# Altium PCB TestCase1.PcbDoc
Units mil, origin at the board's own origin, x right, y up, seen from the top; angles counter-clockwise.
Board outline 2390 x 1990 mil, 2 copper layers (TopLayer, BottomLayer); 173 components, 102 nets, 472 pads, 113 vias.
Unrouted connection lines stored in the file: 6.
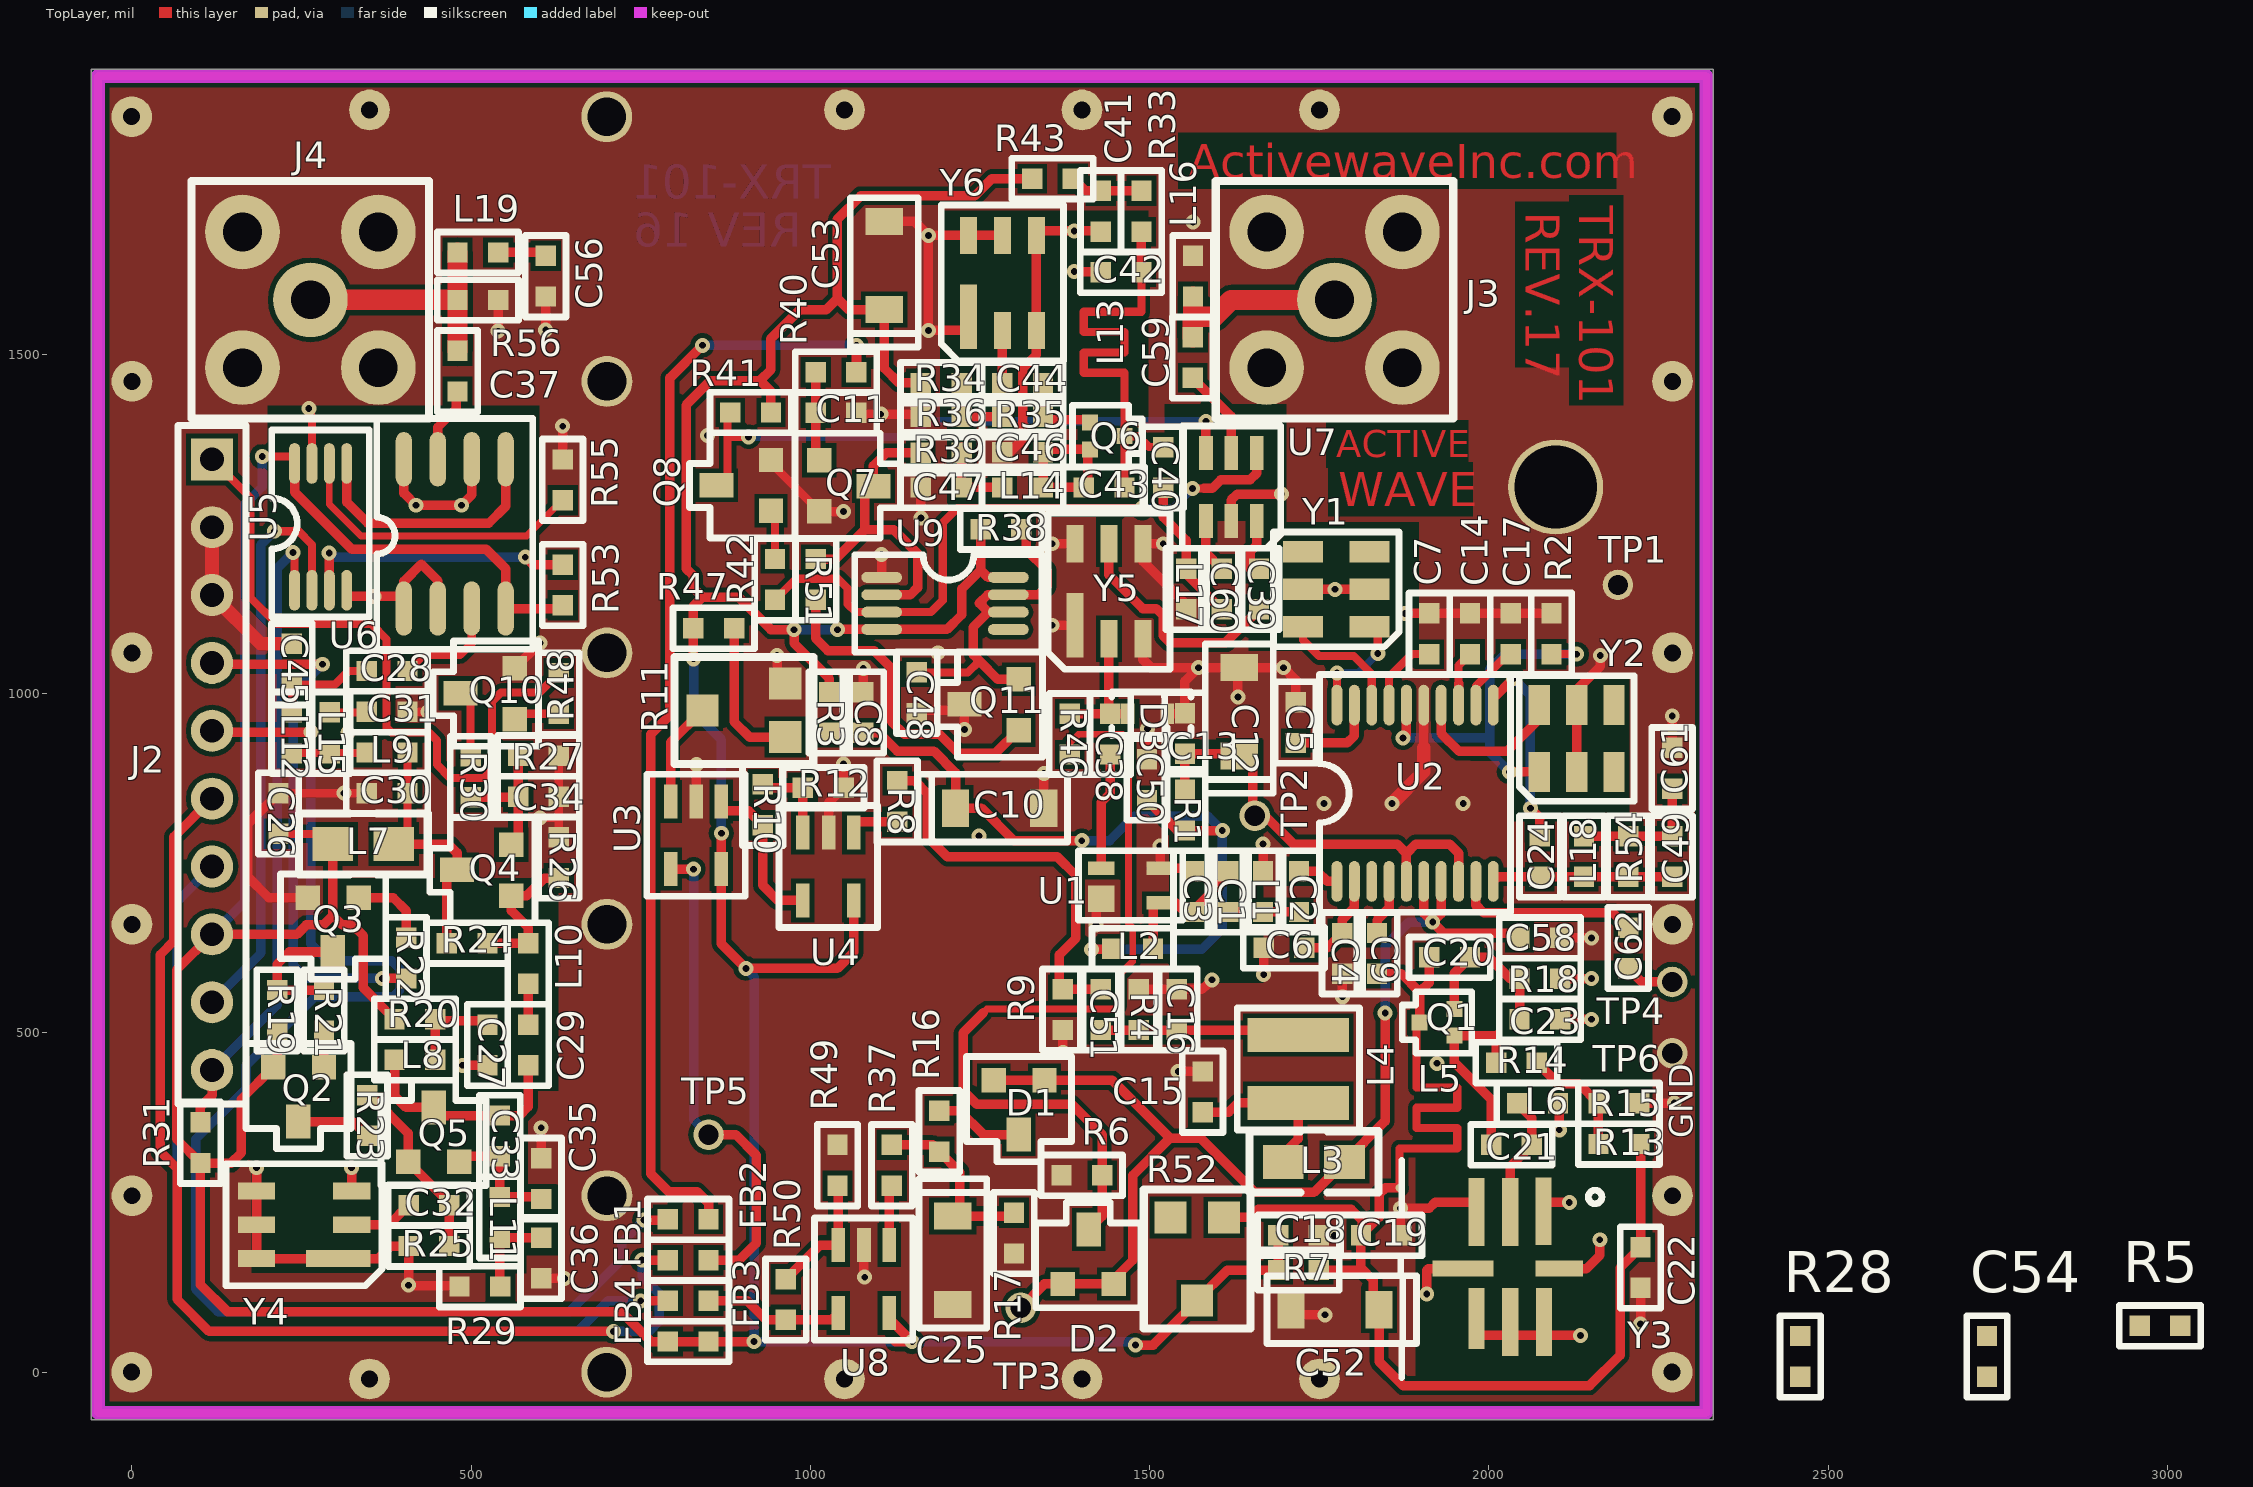
[diagram p0: TopLayer view]
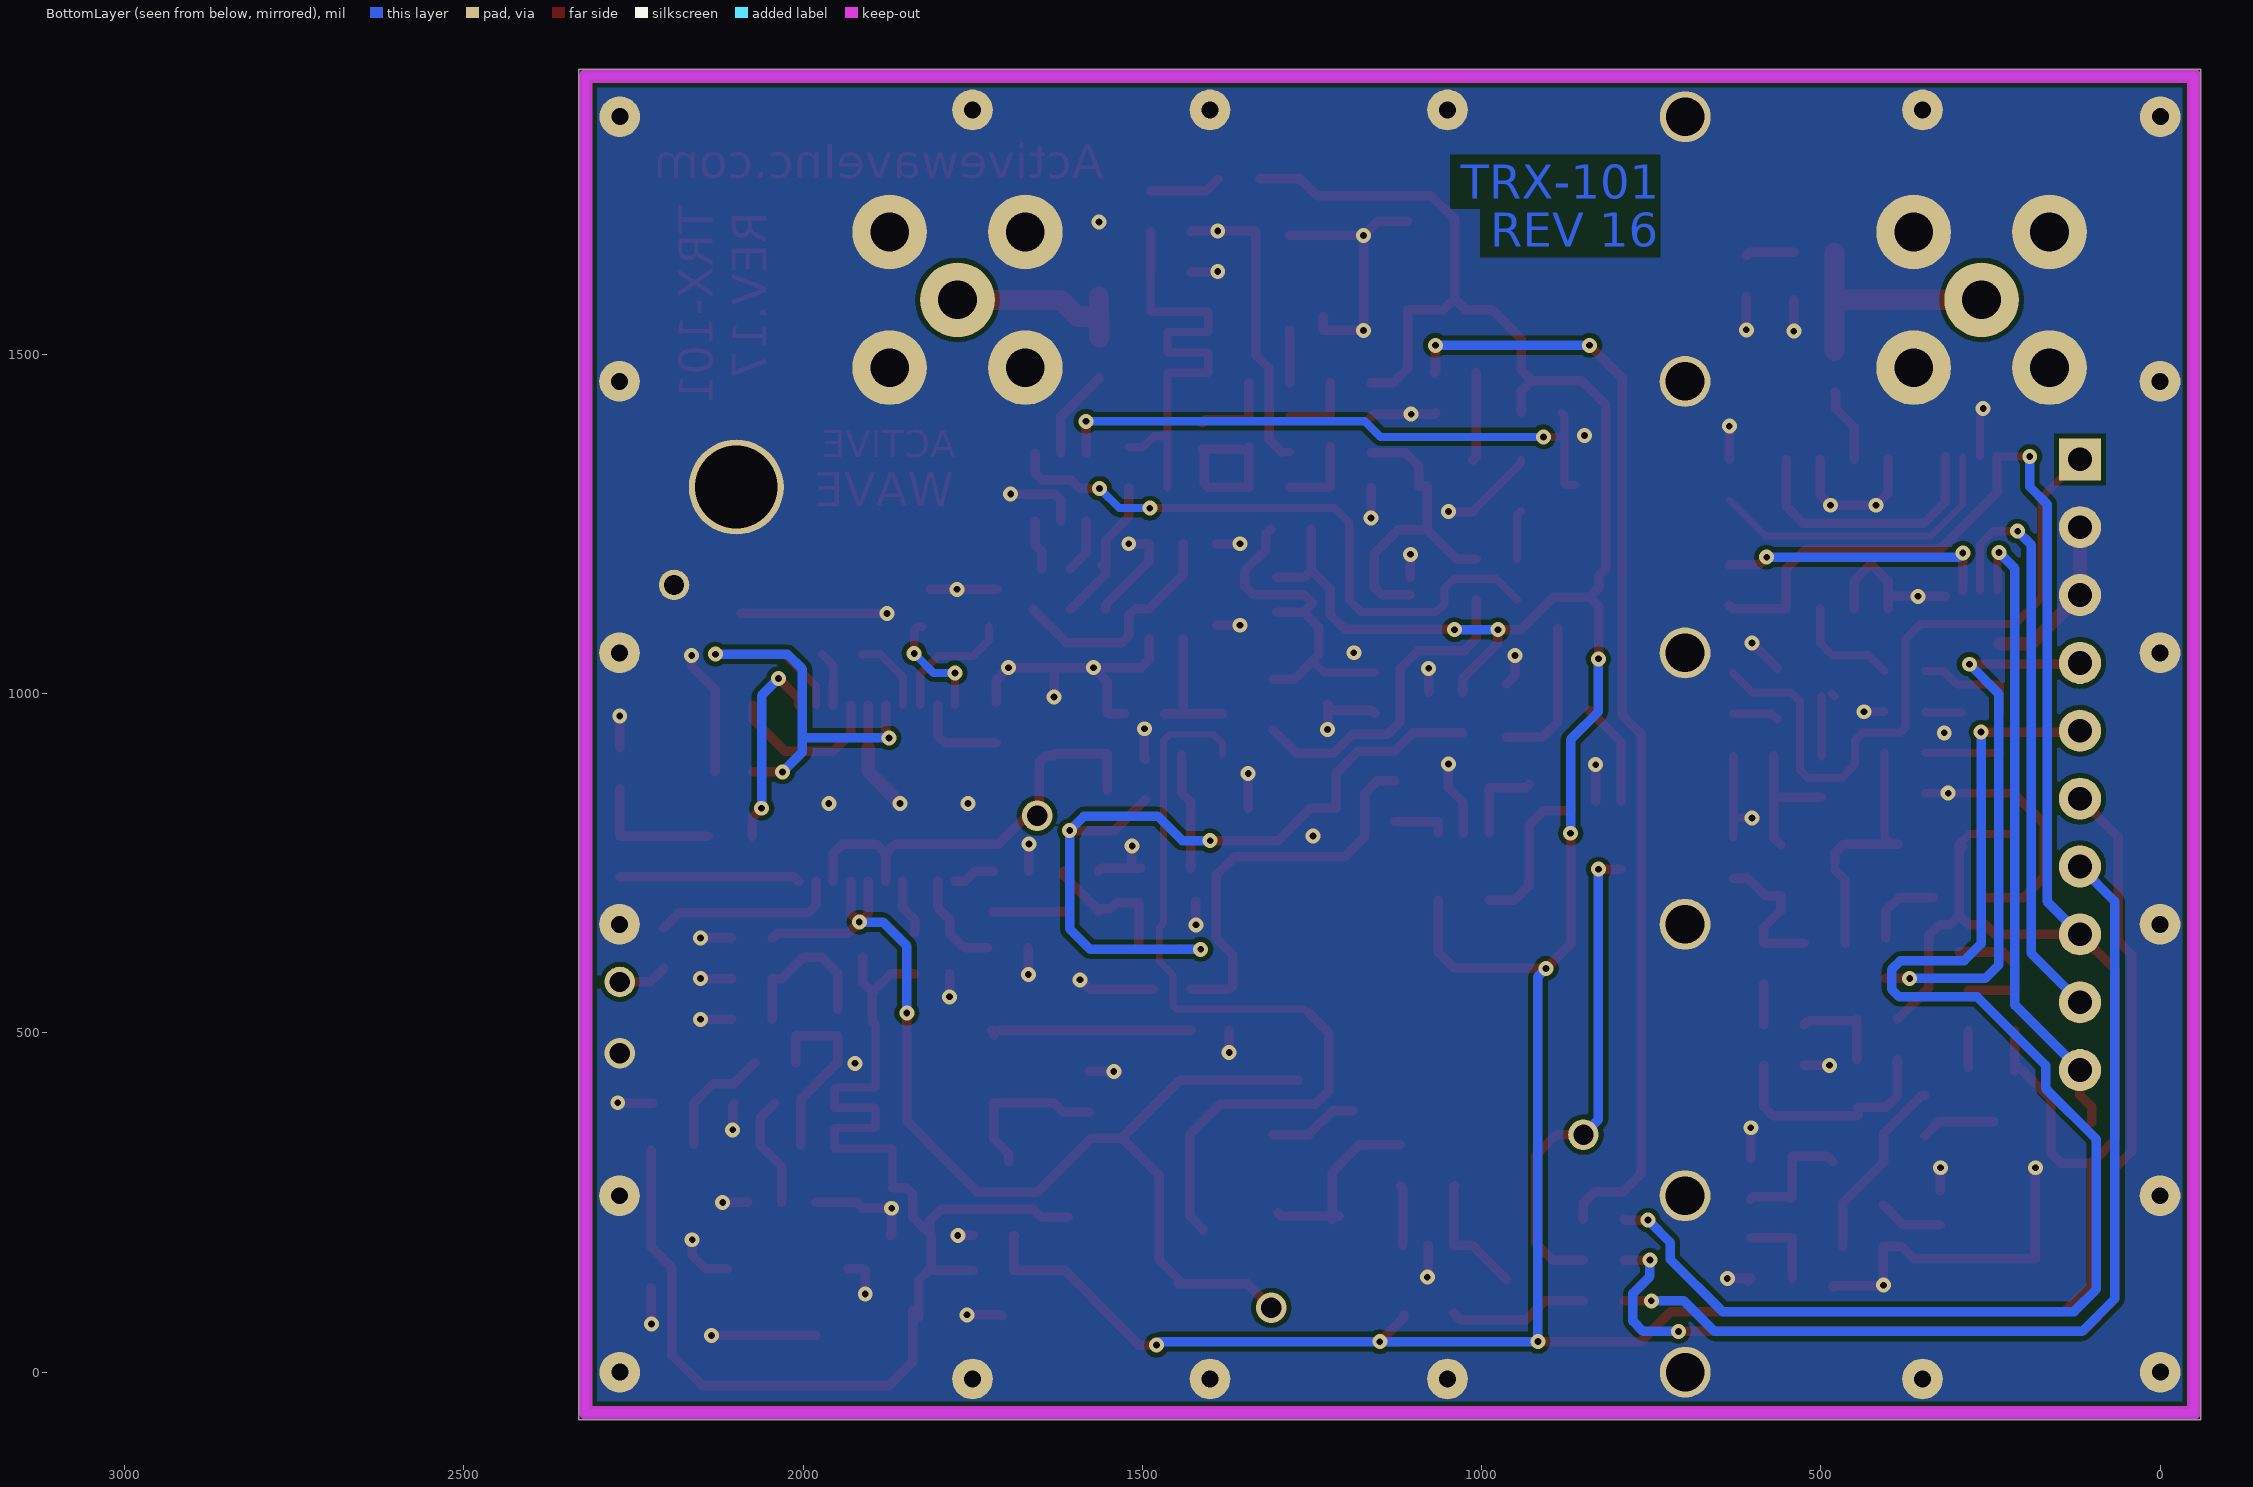
[diagram p1: BottomLayer view, seen from below]

## Layer stack, top to bottom
TopLayer: signal copper 1.4
Dielectric: core 12.6, FR-4, Dk 4.8
BottomLayer: signal copper 1.4

## Board outline
-59.68,-70 2330.32,-70 2330.32,1920 -59.68,1920

## Design rules (kind name [scope] priority, off if disabled: settings)
Clearance Clearance_1 [InNet('GND_SIGNAL')] p1 off: gap=10
Clearance [All] p2: gap=7
ComponentClearance [All] p1 off: gap=10 collisioncheckmode=0 verticalgap=10
PolygonConnect [All] p1: connectstyle=Direct reliefconductorwidth=10 reliefentries=4 polygonreliefangle="90 Angle"
RoutingVias RoutingVias_1 [All] p1: holewidth=10 width=22 viastyle="Through Hole" minholewidth=10 minwidth=22 maxholewidth=10 maxwidth=22
SolderMaskExpansion [All] p1: expansion=4
TestPointUsage [All] p1: valid=0 allowmultiple=FALSE
Testpoint [All] p1: side=15 testpointundercomponent=TRUE minsize=40 maxsize=100 preferedsize=60 minholesize=20 maxholesize=40 preferedholesize=32 testpointgrid=1 style=1023 order=0123456789
Width [All] p1: maxlimit=100 minlimit=8 preferedwidth=10
18 further rules are at their usual default settings.

## Components (designator, comment, footprint, x,y, rotation, side; value= is the part's Value field where it differs from the comment)
C1 "27 pF" 0603 1616,738.18 r270 top
C2 ".1uF" 0603 1720,678.18 r90 top
C3 "5 pF" 0603 1565,678.18 r90 top
C4 ".1uF" 0603 1784,587.18 r90 top
C5 ".1uF" 0603 1715,927.18 r90 top
C6 "100pF" 0603 1668,625.18 r0 top
C7 ".1uF" 0603 1912.06,1058.18 r90 top
C8 ".1uF" 0603 1078,942.18 r90 top
C9 "5pF" 0603 1835,587.18 r90 top
C10 "10uF" "CAP A CASE" 1214,831.18 r0 top
C11 "33 pF" 0603 1007.87,1413.72 r0 top
C12 "10uF" "CAP A CASE" 1632,908.18 r90 top
C13 ".1uF" 0603 1552,911.18 r90 top
C14 ".1uF" 0603 1972.06,1058.18 r90 top
C15 "0.22" 0603 1578,443.18 r270 top
C16 "0.001uF" 0603 1540,564.18 r270 top
C17 ".1uF" 0603 2032.06,1058.18 r90 top
C18 ".1uF" 0603 1689.36,201.54 r0 top
C19 "33 pF" 0603 1811.36,201.54 r0 top
C20 ".5 pF" 0603 1912,611.18 r0 top
C21 "100 pF" 0603 2003.23,334.93 r0 top
C22 ".1uF" 0603 2223.32,184.18 r270 top
C23 "4pF" 0603 2045,520 r0 top
C24 "1pF" 0603 2075,730 r90 top
C25 "10uF" "CAP A CASE" 1210,230 r270 top
C26 ".1uF" 0603 216.32,793.18 r90 top
C27 "100 pF" 0603 524.32,452.18 r90 top
C28 "4 pF" 0603 406.32,1033.18 r180 top
C29 "47 pF" 0603 584.32,512.18 r270 top
C30 "10 pF" 0603 406.32,853.18 r180 top
C31 "5 PF" 0603 346.32,973.18 r0 top
C32 "100 pF" 0603 408,246.18 r0 top
C33 "2 pF" 0603 542.32,318.18 r90 top
C34 "100 pF" 0603 569.32,848.18 r0 top
C35 "7 PF" 0603 603.32,315.18 r270 top
C36 "100 pF" 0603 603.32,198.18 r270 top
C37 "47 pF" 0603 480,1505 r270 top
C38 "100 pF" 0603 1442,970.18 r270 top
C39 "100 pF" 0603 1661,1184 r270 top
C40 "47 pF" 0603 1520,1303.18 r90 top
C41 ".001uF" 0603 1427.87,1740.72 r270 top
C42 "33 pF" 0603 1487.94,1620.65 r180 top
C43 "3 pF" 0603 1462.87,1303.72 r180 top
C44 "100 pF" 0603 1342.87,1457.72 r180 top
C45 "3 pF" 0603 236,1013.25 r90 top
C46 "6 pF" 0603 1342.87,1355.72 r180 top
C47 "100 pF" 0603 1162.87,1303.72 r0 top
C48 ".1uF" 0603 1157,1031.18 r270 top
C49 "39pF" 0603 2270,730 r90 top
C50 ".1uF" 0603 1496,843.18 r90 top
C51 ".1uF" 0603 1428,564.18 r270 top
C52 "10uF" "CAP A CASE" 1838,92.18 r180 top
C53 "10uF" "CAP A CASE" 1108.87,1565.72 r90 top
C54 ".1uF" 0603 2733.86,-6.72 r90 top
C56 "3 pF" 0603 610,1645 r270 top
C58 "1000pF" 0603 2105,640 r180 top
C59 "100 pF" 0603 1563.32,1525.18 r270 top
C60 "6.5 pF" 0603 1606,1184 r270 top
C61 ".1uF" 0603 2270,860 r90 top
C62 ".1uF" 0603 2205,595 r90 top
D1 "1N914" "SOT23 DIODE" 1345,430 r180 top
D2 "1N914" "SOT23 DIODE" 1372,130 r0 top
D3 "BAR 65" "DIODE SC79" 1497.01,970.18 r180 top
FB1 "FB" 0603 850,165.18 r180 top
FB2 "FB" 0603 850,225.18 r180 top
FB3 "FB" 0603 850,105.18 r180 top
FB4 "FB" 0603 790,45.18 r0 top
J2 "CON10" "1X10 HEADER" 118.32,1345.18 r270 top
J3 "SMA ANT" "50 OHM ANT" 1772.32,1580.18 r0 top locked
J4 "SMA ANT" "50 OHM ANT" 263.32,1580.18 r0 top locked
L1 "4.7nH" 0603 1667,678.18 r90 top
L2 "8.2nH" 0603 1505,624.18 r180 top
L3 "6.8 uH" 0805 1697,310 r0 top
L4 "2.2 mH" "COIL TKS5540CT-ND" 1718.98,446.71 r0 top
L5 "Microstrip" MICROSTRIP 1868.24,271.67 r90 top
L6 "???" 0603 2041.62,396.18 r0 top
L7 "330 nH" 0805 296.32,778.18 r0 top
L8 "100 nH" 0603 447.32,460.18 r180 top
L9 "6.8 nH" 0603 406.32,913.18 r180 top
L10 "47 nH" 0603 584.32,572.18 r90 top
L11 "100 nH" 0603 542.32,258.18 r270 top
L12 "22nH" 0603 236,912.25 r90 top
L13 "Microstrip" MICROSTRIP 1487.94,1620.65 r270 top
L14 "0.18uH" 0603 1282.87,1303.72 r0 top
L15 "6.8 nH" 0603 292,912.25 r90 top
L16 "3.9nH" 0603 1563.86,1585 r90 top
L17 "4.7nH" 0603 1554,1124 r90 top
L18 "5.6uH" 0603 2140,730 r90 top
L19 "6.8 nH" 0603 540,1650 r180 top
Q1 "NE85619" "3 PIN ULTRA SUPER MINI MOLD" 1949,535.18 r180 top
Q2 "2N3906" "SOT23 TRANS" 283.32,449.18 r180 top
Q3 "2N3904" "SOT23 TRANS" 334.32,699.18 r180 top
Q4 "BFR193" "SOT23 TRANS" 559.32,702.18 r90 top
Q5 "BFR193" "SOT23 TRANS" 407.32,310.18 r0 top
Q6 "NE85619" "3 PIN ULTRA SUPER MINI MOLD" 1411.87,1359.72 r0 top
Q7 "2N3904" "SOT23 TRANS" 1012.87,1343.72 r270 top
Q8 "2N3904" "SOT23 TRANS" 942,1269.18 r90 top
Q10 "2N3904" "SOT23 TRANS" 564.31,962.25 r90 top
Q11 "2N3906" "SOT23 TRANS" 1307,946.18 r90 top
R1 "56" 0603 1552,798.18 r90 top
R2 "330" 0603 2092.06,1058.18 r90 top
R3 "10" 0603 1028,942.18 r90 top
R4 "470" 0603 1484,564.18 r270 top
R5 "3.3K" 0603 2958.86,68.28 r0 top
R6 "10K" 0603 1430,290 r180 top
R7 "560" 0603 1749.36,150.54 r180 top
R8 "1K" 0603 1128,871.18 r270 top
R9 "150K" 0603 1372,564.18 r270 top
R10 "100K" 0603 930,866.18 r270 top
R11 "5K POT" "POT PANA EVN5" 900,975.18 r90 top
R12 "10K" 0603 989,861.18 r0 top
R13 "6.8K" 0603 2221.32,336.18 r180 top
R14 "4.7K" 0603 2010.62,456.18 r0 top
R15 "39K" 0603 2161.32,396.18 r0 top
R16 "10" 0603 1190,325 r90 top
R17 "220 K" 0603 1300,235 r270 top
R18 "1K" 0603 2105,580 r180 top
R19 "4.7K" 0603 214.32,503.18 r90 top
R20 "22" 0603 387.32,520.18 r0 top
R21 "2.2K" 0603 283.32,563.18 r270 top
R22 "4.7K" 0603 404.32,640.18 r270 top
R23 "6.8k" 0603 347,348.25 r90 top
R24 "470" 0603 464.32,632.18 r0 top
R25 "3.3K" 0603 468,185.86 r180 top
R26 "1K" 0603 629.32,728.18 r90 top
R27 "560" 0603 569.32,908.18 r0 top
R28 "5.6K" 0603 2458.86,-6.72 r90 top
R29 "180" 0603 543,126.18 r180 top
R30 "68" 0603 499.32,907.18 r270 top
R31 "100K" 0603 101.32,308.18 r90 top
R33 "22" 0603 1487.87,1680.72 r90 top
R34 "6.8K" 0603 1162.87,1457.72 r0 top
R35 "4.7K" 0603 1342.87,1407.72 r180 top
R36 "39K" 0603 1222.87,1407.72 r180 top
R37 "1K" 0603 1120,335 r270 top
R38 "10K" 0603 1311,1242.18 r180 top
R39 "68" 0603 1162.87,1354.72 r0 top
R40 "4.7K" 0603 1067.87,1473.72 r180 top
R41 "10K" 0603 882,1414.18 r0 top
R42 "4.7K" 0603 948,1198.18 r270 top
R43 "22" 0603 1326.87,1758.72 r0 top
R46 "2.2K" 0603 1382.01,910.18 r90 top
R47 "15K" 0603 887.68,1096.25 r180 top
R48 "1K" 0603 629.31,970.25 r90 top
R49 "10K" 0603 1040,275 r90 top
R50 "56K" 0603 964,137.18 r270 top
R51 "4.7K" 0603 1008,1198.18 r270 top
R52 "5K POT" "POT PANA EVN5" 1570,165 r180 top
R53 "10K" 0603 635,1190 r270 top
R54 "8.2K" 0603 2205,790 r270 top
R55 "1K" 0603 635,1345 r270 top
R56 "50" 0603 540,1580 r180 top
TP1 "TP" TESTPOINT 2190,1160 r90 top
TP2 "TP" TESTPOINT 1655,820 r90 top
TP3 "TP" TESTPOINT 1310,95 r90 top
TP4 "TP" TESTPOINT 2270,575 r90 top
TP5 "TP" TESTPOINT 850,350 r90 top
TP6 "GND" TESTPOINT 2270,470 r90 top
U1 "BGA2001" SOT343 1472,717.18 r270 top
U2 "SA636DK" SSOP20 1776,723.18 r0 top
U3 "TLV1391" SOT25 869,841.18 r270 top
U4 "LMV821" SOT25 1064,795.18 r270 top
U5 "DS1804" "SO8 SMALL" 240,1152.25 r0 top
U6 "AT-113" SO8 401,1125.25 r90 top
U7 "UPG52TA" TO6 1583,1254.18 r90 top
U8 "LMV821" SOT25 1116,187.18 r270 top
U9 "LMC555" "SO8 SMALL" 1105,1171.18 r270 top
Y1 "10.7 Mhz Filter" FILTER2 1824.1,1098.5 r90 top
Y2 "10.7 Mhz Filter" FILTER2 2074.05,884.5 r0 top
Y3 "905.8_Resonator" RESONATOR 2031.32,152.18 r0 top
Y4 "433.92_Resonator" RESONATOR2 254,217.25 r180 top
Y5 "916.5_MHz Saw Filter" RESONATOR2 1439.98,1150.71 r90 top
Y6 "916.5_Resonator" RESONATOR2 1282.94,1605.04 r90 top

## Footprints (in the part's own frame and the unit in brackets; to place one, negate y for a bottom-side part, rotate by r counter-clockwise, add the part's x,y. Pads: shape width x height; smd on the part's side, far side on the other; paste and mask are expansions set on the pad)
"1X10 HEADER" [mil]
  rect 62x62 hole 35: 1(0,0)
  round 62 hole 35: 2(100,0) 3(200,0) 4(300,0) 5(400,0) 6(500,0) 7(600,0) 8(700,0) 9(800,0) 10(900,0)
  silkscreen extent -50,-50 950,50
"3 PIN ULTRA SUPER MINI MOLD" [mm]
  rect 0.6x0.6 smd: B(0,1) C(1.3,0.5) E(0,0)
  silkscreen extent -0.65,-0.65 1.95,1.65
"50 OHM ANT" [mil]
  round 110 hole 57: 1(0,0) 2(-100,100) 3(100,100) 4(100,-100) 5(-100,-100)
  silkscreen extent -175,-175 175,175
0603 [mil]
  rect 30x30 smd: 1(0,0) 2(60,0)
  silkscreen extent -30,-30 90,30
0805 [mil]
  rect 60x50 smd: 1(0,0) 2(90,0)
  silkscreen extent -50,-45 140,45
"CAP A CASE" [mil]
  rect 40x55 smd: 1(0,0) 2(130,0)
  silkscreen extent -55,-50 165,50
"COIL TKS5540CT-ND" [mil]
  rect 150x50 smd: 1(0,-50) 2(0,50)
  silkscreen extent -90,-90 90,90
"DIODE SC79" [mil]
  rect 20x30 smd: A(29,0) K(-29,0)
  silkscreen extent -64,-32 53,32
FILTER2 [mm]
  rect 0.8x1.5 smd: 1(0,0) 2(1.4,2.5) 2(1.4,0) 3(2.8,0) 3(2.8,2.5) 4(0,2.5)
  silkscreen extent -0.75,-1.1 3.55,3.6
MICROSTRIP [mil]
  round 12 smd: 1(0,0) 2(241.41,-25)
  TopLayer lines w12: 0,0 57.94,0 57.94,-85 87.94,-85 87.94,-25 117.94,-25 117.94,-30 117.94,-85 147.94,-85 147.94,-25 241.19,-25 241.41,-25
"POT PANA EVN5" [mm]
  rect 1.2x1.2 smd: 1(-1,-1.6) 2(0,1.5) 3(1,-1.6)
  silkscreen extent -2,-2.65 2,2.55
RESONATOR [mm]
  rect 0.6x2.54 smd: 1(1.245,2.159) 2(0,2.134) 3(-1.27,2.134) 6(0,-1.983) 7(1.27,-1.983)
  rect 2.286x0.6 smd: 4(-1.776,0.008)
  rect 0.6x2.286 smd: 5(-1.27,-1.856)
  rect 1.778x0.6 smd: 8(1.831,0.008)
  silkscreen extent 2.92,2.44 3.43,2.95
RESONATOR2 [mil]
  rect 95x25 smd: 1(-50,50)
  rect 55x25 smd: 2(-70,0) 3(-70,-50) 4(70,-50) 5(70,0) 6(70,50)
  silkscreen extent -115,-90 115,90
SO8 [mil]
  oval 80x24 smd: 1(0,0) 2(0,-50) 3(0,-100) 4(0,-150) 5(220,-150) 6(220,-100) 7(220,-50) 8(220,0)
  silkscreen extent -60,-190 280,40
"SO8 SMALL" [mil]
  oval 16x60 smd: 1(0,0) 2(25.59,0) 3(51.18,0) 4(76.77,0) 5(76.77,186.85) 6(51.18,186.85) 7(25.59,186.85) 8(0,186.85)
  silkscreen extent -33,-39 110,236
"SOT23 DIODE" [mil]
  rect 36x36 smd: A(0,0) A(75,0)
  rect 36x50 smd: K(38,80)
  silkscreen extent -40,-35 115,120
"SOT23 TRANS" [mil]
  rect 36x36 smd: B(0,0) E(75,0)
  rect 36x50 smd: C(38,80)
  silkscreen extent -40,-35 115,120
SOT25 [mil]
  rect 50x20 smd: 1(0,0) 2(0,-37) 3(0,-75) 4(100,-75) 5(100,0)
  silkscreen extent -40,-110 140,35
SOT343 [mm]
  rect 1x1 smd: 1(0.5,-1.1)
  rect 0.5x1 smd: 2(-0.65,-1.1) 3(-0.65,1.1) 4(0.65,1.1)
  silkscreen extent -1.3,-1.95 1.3,1.95
SSOP20 [mil]
  oval 16x60 smd: 1(0,0) 2(25.59,0) 3(51.18,0) 4(76.77,0) 5(102.36,0) 6(127.95,0) 7(153.54,0) 8(179.13,0) 9(204.72,0) 10(230.31,0) 11(230.31,259.84) 12(204.72,259.84) 13(179.13,259.84) 14(153.54,259.84) 15(127.95,259.84) 16(102.36,259.84) 17(76.77,259.84) 18(51.18,259.84) 19(25.59,259.84) 20(0,259.84)
  silkscreen extent -26,-45 256,305
TESTPOINT [mil]
  round 45 hole 30: 1(0,0)
TO6 [mil]
  rect 50x20 smd: 1(0,-75) 2(0,-37) 3(0,0) 4(100,0) 5(100,-37) 6(100,-75)
  silkscreen extent -40,-110 140,35

## Part data
C24 C49 C61 C62: library part CAP, "Capacitor"
C54: library part CAP_NP
L18 L19: library part INDUCTOR
R5 R28 R55 R56: library part RESISTOR
R52: library part POT1, "Potentiometer"
R54: library part R
TP6: library part TP

## Free pads (board coordinates)
  round 60 hole 25: 0(0,0) 0(0,1850) 0(0.32,260) 0(0.32,660) 0(0.32,1060) 0(0.32,1460) 0(350.32,-10) 0(350.32,1860) 0(1050.32,-10) 0(1050.32,1860) 0(1400.32,-10) 0(1400.32,1860) 0(1750.32,-10) 0(1750.32,1860) 0(2270,0) 0(2270,1850) 0(2270.32,260) 0(2270.32,660) 0(2270.32,1060) 0(2270.32,1460)
  round 75 hole 57: 0(700,0) 0(700,1850) 0(700.32,260) 0(700.32,660) 0(700.32,1060) 0(700.32,1460)
  round 140 hole 122: 0(2098.32,1304.18)

## Via types
v1: diameter 22, hole 10, TopLayer to BottomLayer, tented both sides, 107 vias
v2: diameter 22, hole 10, TopLayer to BottomLayer, 6 vias

## Nets (pads, with @x,y where several pads share a name; then routed paths per layer and width w, separated by ;. In a path a pad name is that pad's centre, name@x,y a point inside that pad or via, vN(x,y) a via of type N, cw(c..) or ccw(c..) an arc to the next point about the centre after c; other vN are vias at no path point)
433_TX_DATA: J2.4 R22.2 | length 799.7
  TopLayer w14: J2.4 120.32,1043.18 v1(281.32,1043.18) ; v1(369.32,580.18) R22.2
  BottomLayer w14: v1(281.32,1043.18) 237.72,999.57 237.72,600.33 257.87,580.18 v1(369.32,580.18)
916_RX_DATA: FB1.1 TP5.1 U3.4 | length 727
  TopLayer w14: U3.4 v1(827.82,741.18) ; FB1.1@850,165 895,165 920,190 920,320 890,350 TP5.1
  BottomLayer w14: v1(827.82,741.18) 827.82,372.18 TP5.1
916_RX_FILTER_OUT: C38.2 U1.2 | length 172.9
  TopLayer w14: U1.2 1428.69,839.87 1442,853.18 C38.2
916_TX-DATA: FB2.1 R40.1 | length 1648.6
  TopLayer w14: v1(841,1513.18) 793,1465.18 793,968.18 765,940.18 765,292.18 791,266.18 833,266.18 850,249.18 FB2.1 ; v1(1068,1513.18) 1068,1473.84 R40.1 R40.1@1069.87,1471.72
  BottomLayer w14: v1(841,1513.18) v1(1068,1513.18)
+5V: C18.1 C26.1 C53.1 FB4.1 FB4.2 J2.8 L7.1 Q2.E R3.2 R5.1 R7.2 R19.1 R20.1 R31.1 R34.1 R38.2 R41.2 R43.1 R47.2 R52.2 R53.2 U3.5 U4.5 U5.8 U8.5 U9.4 U9.8 | length 7966.6
  TopLayer w12: v1(192.31,1349.33) 239.77,1349.33 U5.8@240,1349.1 ; C26.1 281.32,793.18 L7.1
  TopLayer w14: Q2.E 161.32,402.18 161.32,323.18 146.32,308.18 R31.1 ; Q2.E@214.32,444.18 214.32,449.18 R19.1 ; U5.8@240,1349.1 U5.8 240,1297 324,1213 522.18,1213 551,1184.18 551,1125.25 630.25,1125.25 R53.2 ; L7.1@291.32,773.18 L7.1 296.32,673.18 ; R20.1 341.32,566.18 341.32,643.18 325.32,659.18 310.32,659.18 296.32,673.18 ; v1(828,1051.18) 827.68,1051.5 R47.2 827.68,1128.86 841,1142.18 ; v1(869,794.18) U3.5 869,631 v2(905,595) 1040,595 1064,619 U4.5 ; v1(917,45.18) FB4.2 FB4.1 765,45.18 721,89.18 141,89.18 101.32,128.86 R31.1 ; R41.2 942,1445.18 926,1461.18 ; R3.2 1028,1022.18 976,1074.18 v1(976,1094.18) 942,1094.18 894,1142.18 841,1142.18 ; v1@1040.23,1094.41 U9.4 1201.23,1094.41 1223,1116.18 1223,1154.18 1251,1182.18 ; U8.5@1115,85 1115,80 v1(1150,45) 1125,45 ; R34.1 1130.46,1457.72 1108.87,1479.31 C53.1 1056.46,1565.72 1040,1582.18 ; R38.2 1251,1182.18 ; U9.8@1301.85,1171.18 U9.8 1262,1171.18 1251,1182.18 ; R43.1 1267.6,1758.72 1242.52,1733.64 1074.46,1733.64 1040,1699.18 1040,1582.18 ; v1@1481,40 1505,40 1570,105 R52.2 1614.6,150.54 R7.2 C18.1 C18.1@1687.82,200 ; R31.1 66.32,343.18 66.32,593.18 J2.8 243.32,645.18 257.32,659.18 282.32,659.18 296.32,673.18 ; 841,1142.18 827.68,1155.5 827.68,1173.5 817,1184.18 817,1425.18 853,1461.18 926,1461.18 ; 926,1461.18 942,1477.18 942,1523.18 984.54,1565.72 1023.54,1565.72 1040,1582.18
  BottomLayer w14: J2.8 166.85,693.71 166.85,1279.25 192.31,1304.71 v1(192.31,1349.33) ; v1(828,1051.18) 828,973.18 869,932.18 v1(869,794.18) ; v2(905,595) 917,583 v1(917,45.18) 917.18,45 v1(1150,45) 1474,45 v1(1479,40) ; v1(976,1094.18) v1(1040,1094.18)
AGC: D2.K R6.1 R46.1 | length 1226.5
  TopLayer w10: 1255,530 1260,535 1450,535 1455,540 1455,585 1475,605 1475,655 1469,661 1469,931 1460,940 1395,940 1382.01,927.01 R46.1
  TopLayer w14: 1255,530 1225,500 1225,415 1245,395 1385,395 1430,350 R6.1 1430,230 D2.K
GND_SIGNAL: C3.2 C4.1 C5.2 C6.1 C7.2 C8.2 C10.2 C11.2 C12.2 C13.2 C14.2 C15.1 C16.1 C17.2 C18.2 C19.2 C22.2 C23.2 C25.2 C26.2 C27.1 C30.2 C31.2 C34.2 C35.1 C36.2 C41.2 C42.2 C45.2 C46.2 C47.1 C48.2 C50.2 C52.2 C53.2 C54.2 C56.2 C58.1 C61.2 D3.K J2.2 J2.3 J3.2 J3.3 J3.4 J3.5 J4.2 J4.3 J4.4 J4.5 L1.2 L6.2 L16.2 L17.1 pad.0 Q3.E Q7.E Q8.E Q10.E Q11.C R2.2 R4.1 R6.2 R9.2 R11.3 R12.2 R15.2 R17.2 R18.1 R25.2 R26.2 R27.2 R28.2 R29.2 R36.2 R49.2 R55.1 R56.1 TP1.1 TP6.1 U1.1 U1.3 U2.15 U3.2 U4.2 U5.4 U5.7 U6.1 U6.2 U6.6 U6.8 U7.2 U8.2 U9.1 Y1.2 Y2.2 Y3.1 Y3.3 Y3.4 Y3.5 Y3.6 Y3.7 Y3.8 Y4.1 Y4.3 Y4.4 Y4.5 Y4.6 Y5.1 Y5.3 Y5.4 Y5.6 Y6.1 Y6.3 Y6.4 Y6.5 Y6.6 | length 6647.4
  TopLayer w12: C26.2 v1(312.52,853.18) C30.2 ; v1(261,1420) 265.59,1406.86 U5.7@265.59,1349.1 ; C31.2 v1(436.64,973.18) ; v1(601.76,816.71) 629.32,816.71 ; R26.2 629.32,816.71 ; R27.2 C34.2 629.32,816.71 ; Q8.E 942,1339.59 Q7.E ; C46.2 C46.2@1294.54,1355.72
  TopLayer w14: v1(184,301.25) Y4.4 Y4.5 Y4.6 Y4.1 363.07,167.25 381.68,185.86 R25.2 v1(408,128.18) 407,127.18 408,127.18 482,127.18 R29.2 ; C26.2 170.79,807.65 170.79,730.25 201.86,699.18 Q3.E ; U5.4@316.77,1143.25 v1(357,1143.25) 400.61,1143.25 U6.1@401,1143.64 ; Y4.3 v1(324,301.25) ; U6.1 U6.1@401,1143.64 ; U6.8 401,1295.32 v1(418.82,1277.5) v1(485.75,1277.5) 501,1292.75 U6.6 ; U6.2 451,1166.58 426.69,1190.88 401,1165.19 U6.1@401,1143.64 ; v1(487.32,452.18) C27.1 ; v1@539,1533 v1(540,1534) R56.1 ; Q10.E v1(601.76,1074.69) ; C35.1 v1(603.32,360.18) ; C36.2@607.32,134.18 C36.2 v1(638,138.18) ; v1(610,1536) C56.2 ; R55.1 v1(635,1394) ; U3.2 v1(832,895.18) ; v1(951,1056.18) 951,1026.54 R11.3 ; Q7.E Q7.E@1013.41,1268.18 ; Q7.E@1013.87,1267.72 Q7.E@1013.41,1268.18 ; U4.2 1027,839.18 R12.2 v1(1049,896.18) ; v1(1049,1268.18) Q7.E@1013.41,1268.18 ; C11.2 1069.87,1411.72 v1(1103.87,1411.72) 1158.87,1411.72 R36.2 ; C8.2 v1(1078,1037.18) ; v2@1079,141 U8.2 ; U9.1 v1(1105,1205.18) ; C53.2 1153.42,1695.72 v1(1174.09,1675.04) ; C48.2 1161,975.18 1218,975.18 Q11.C v1(1227,947.18) ; v1(1162.87,1258.72) C47.1 ; Y6.1 1233.15,1555.04 1233.15,1535.04 1232.94,1535.04 v1(1174.09,1535.04) v1(1174.09,1675.04) ; Y6.5 Y6.6 v1(1174.09,1675.04) ; C46.2@1294.54,1355.72 1313,1374.18 1313,1479.18 1332.94,1499.13 Y6.3 Y6.4 1332.94,1680.34 1334.32,1681.72 v1(1388.87,1681.72) 1426.87,1681.72 C41.2 ; C10.2 v1(1344,882.18) ; v1(1356,1100.71) Y5.1 ; v1(1356,1220.71) Y5.6 ; v1(1372,471.18) R9.2 ; v1(1388.87,1621.72) 1426.87,1621.72 C42.2 ; v1(1421,659.18) U1.1@1421,693.87 ; R4.1 C16.1 1577,564.18 v1(1592,578.18) ; Y5.3 1489.98,1050.02 1501.82,1038.18 v1(1572,1038.18) ; C50.2 1497,904.18 v1(1497,948.18) ; U1.3@1502.41,742.77 U1.3 ; v1(1515,775.18) 1515.31,774.87 U1.3 ; v1(1520,1220.71) Y5.4 1489.98,1195.02 1554,1131 L17.1 ; D3.K 1551,970.18 C13.2 1552,1018.18 v1(1572,1038.18) ; v1(1542,443.18) C15.1 ; C3.2 1560.41,742.77 U1.3 ; U7.2 1620,1285 1629,1294 v1(1694,1294) ; v1(1630,995) C12.2@1630,1035 ; L1.2 v1(1667,778.18) ; v1(1668,586.18) C6.1 ; C52.2@1707.36,83.54 1708.36,84.54 v1(1758.36,84.54) ; Y1.2@1714.1,1153.61 1725.68,1153.61 v1(1773.16,1153.61) Y1.2@1812.53,1153.61 ; C5.2 1715,1020.18 v1(1697,1038.18) C12.2 v1(1572,1038.18) ; C18.2 v1(1771.86,201.54) ; v1(1784,553.18) C4.1 ; C19.2 1869.36,203.54 v1(1869.36,241.54) 1911.99,241.54 1920.63,250.18 Y3.3@1981.32,250.18 ; v1(1876.06,1118.18) C7.2 C14.2 C17.2 R2.2 ; 1903.95,920.13 U2.15 ; v1(1908.32,115.18) 1908.32,150.18 1910.65,152.5 Y3.4@1934.39,152.5 ; Y3.5@1981.32,54.12 2031.32,54.12 2081.32,54.12 v1@2134.88,54.12 ; Y3.1@2081.32,250.18 v1(2118.32,250.18) ; L6.2 2103.62,394.18 v1(2103.62,357.18) ; C23.2 v1(2151,520) ; R18.1 v1(2151,580) ; C58.1 v1(2151,640) ; Y3.8@2111.56,152.5 2143.5,152.5 2163.32,172.32 v1(2163.32,195.18) ; Y2.2@2129.17,884.5 2129.17,982.93 2129.17,1005.17 2164,1040 v1(2164,1056) ; R15.2 2272.18,396.18 v1(2273,397) ; v1(2223.32,70.86) C22.2 ; C61.2 v1(2270,967)
  TopLayer w20: J2.2 J2.3 190.25,1073.25 C45.2 ; v1(1857,838.18) 1903.95,885.13 1903.95,920.13
  other v1: 2135,54 1923.32,455.18 1248.32,790.18 1757,838.18 1962,838.18 318.32,942.18 1188.32,1060.18 848.32,1380.18 1563.86,1695
  other v2: 1080,140
NetC1_2: C1.2 C2.1 L1.1 | length 104
  TopLayer w14: C1.2 L1.1 C2.1
NetC2_2: C2.2 U2.1 | length 62.2
  TopLayer w14: C2.2 1747,738.18 1762,723.18 U2.1
NetC4_2: C4.2 C6.2 U2.2 | length 148.4
  TopLayer w14: C6.2 1762,625.18 C4.2 1784,667.18 1801.59,684.77 U2.2
NetC9_2: C9.2 U2.4 | length 83.4
  TopLayer w14: C9.2 1835,666.18 1852.77,683.95 U2.4
NetC10_1: C8.1 C10.1 C50.1 L2.2 R1.1 R3.1 | length 1210.4
  TopLayer w14: R3.1 C8.1 1101,942.18 1128,915.18 1182,915.18 1214,883.18 C10.1 1252,831.18 1300,783.18 v1(1400,783.18) ; v1(1414,623.18) 1444,623.18 L2.2 ; C50.1 1541,798.18 R1.1 v1(1607,798.18)
  BottomLayer w14: v1(1400,783.18) 1441,783.18 1477,819.18 1586,819.18 v1(1607,798.18) 1607,653.18 1577,623.18 v1(1414,623.18)
NetC15_2: C15.2 L3.1 L4.1 | length 242.4
  TopLayer w14: C15.2 1616.46,383.18 1629.99,396.71 L4.1 1718.98,343.97 1697,321.98 L3.1
NetC21_1: C21.1 Q1.B R14.1 | length 284.6
  TopLayer w14: C21.1 2003.23,402.12 1949,456.35 Q1.B 2010.25,495.81 ; R14.1 2010.62,496.18
NetC21_2: C21.2 L6.1 Y3.2 | length 168.2
  TopLayer w14: Y3.2@2031.32,250.18 2031.32,303.02 C21.2 2063.23,374.57 L6.1
NetC24_1: C24.1 C49.1 L18.1 R54.2 U2.10 | length 266.5
  TopLayer w14: U2.10 2013.13,730 C24.1 L18.1 R54.2 C49.1
NetC24_2: C24.2 U2.11 | length 299.4
  TopLayer w14: U2.11 2006.31,992.32 v2(2036,1022) ; v2(2061,831) 2075,817 C24.2
  BottomLayer w14: v2(2036,1022) 2061,997 v2(2061,831)
NetC27_2: C27.2 L8.1 R20.2 | length 140.3
  TopLayer w14: L8.1 R20.2 449.32,518.18 518.32,518.18 C27.2
NetC29_1: C29.1 L10.1 | length 60
  TopLayer w14: C29.1 L10.1
NetC31_1: C31.1 L15.2 | length 54.7
  TopLayer w12: L15.2 345.39,972.25 C31.1
NetC32_2: C32.2 Q5.B R23.2 R25.1 | length 275
  TopLayer w14: R23.2 351.25,408.25 407.32,352.18 Q5.B 468,249.5 C32.2 R25.1
NetC36_1: C36.1 L11.2 R29.1 | length 121
  TopLayer w14: R29.1@542.32,138.18 L11.2 C36.1
NetC37_1: C37.1 J4.1 L19.2 R56.2 | length 361.8
  TopLayer w30: J4.1 479.82,1580.18 R56.2 ; C37.1 R56.2 ; L19.2 R56.2
NetC39_2: C39.2 Y5.5 | length 346
  TopLayer w14: Y5.5 1439.98,1175.02 1490,1125 1510,1125 1520,1115 1520,1085 1530,1075 1612,1075 C39.2
NetC40_2: C40.2 C43.1 L13.2 Q6.C | length 139.1
  TopLayer w12: C43.1 1462.87,1379.06 1463,1379.18 1463.06,1379.18 1483,1379.18 1499,1363.18 C40.2
NetC44_2: C44.2 Y6.2 | length 77.4
  TopLayer w14: C44.2 1282.94,1457.79 Y6.2
NetC47_2: C47.2 L14.1 R39.2 | length 120
  TopLayer w14: R39.2@1222.87,1363.72 R39.2 C47.2 L14.1
NetC49_2: C49.2 C61.1 L18.2 R54.1 | length 200
  TopLayer w14: L18.2 R54.1 C49.2 C61.1
NetC52_1: C19.1 C22.1 C52.1 L5.1 R7.1 R13.1 R52.1 | length 1330.7
  TopLayer w14: R52.1 1647.99,227.99 1660,240 1796.72,240 1813.18,223.54 C19.1@1813.18,203.36 ; R7.1 1808.36,150.54 1811.36,153.54 ; C52.1@1837.36,73.82 1837.36,83.54 1831.36,83.54 1829.36,81.54 1829.36,92.18 1829.36,135.54 1811.36,153.54 ; C52.1 1838,15.5 1873.32,-19.82 2148.32,-19.82 2193.32,25.18 2193.32,154.18 C22.1 R13.1@2223.32,327.19 ; L5.1 1847.24,271.67 1838.3,262.73 1838.3,228.48 C19.1@1813.18,203.36 ; 1811.36,153.54 C19.1 C19.1@1813.18,203.36
NetC54_1: C54.1 R5.2 R28.1 U6.4
NetC56_1: C56.1 L19.1 | length 72.1
  TopLayer w14: L19.1 605,1650 C56.1
NetC57_2: C20.2 C23.1 Q1.E R18.2 | length 231.4
  TopLayer w14: Q1.E 1949,588.18 C20.2 1999.82,611.18 2031,580 R18.2 C23.1
NetC59_2: C59.2 U7.5 | length 134.5
  TopLayer w14: C59.2 1620,1408.5 U7.5
NetC60_2: C40.1 C60.2 L17.2 | length 221.9
  TopLayer w14: C40.1 1520,1260 1554,1226 L17.2 ; L17.2@1559,1189 L17.2 ; C60.2 1554,1176 L17.2
NetC62_1: C62.1 TP4.1 | length 73.3
  TopLayer w14: C62.1 2225,575 TP4.1
NetC62_2: C62.2 U2.9 | length 273
  TopLayer w14: U2.9 1980.72,688.28 1992,677 2183,677 C62.2
NetD1_K: D1.K R16.2 | length 131.5
  TopLayer w14: R16.2 1220,385 1255,350 D1.K
NetFB1_2: FB1.2 J2.6 | length 1654
  TopLayer w14: J2.6 62,788.86 62,635.18 42,615.18 42,325.18 67,300.18 67,107.18 114,60.18 v1(710,60.18) ; v1(752,165.18) FB1.2
  BottomLayer w14: v1(710,60.18) 762,60.18 777,75.18 777,116.18 752,141.18 v1(752,165.18)
NetFB2_2: FB2.2 J2.5 | length 2050.4
  TopLayer w14: J2.5 120.25,943.25 v1(264,943.25) ; v1(755,224.18) 789,224.18 FB2.2
  BottomLayer w14: v1(264,943.25) 264,631.25 289,606.25 383,606.25 396,593.25 396,564.25 385,553.25 270,553.25 169,452.25 169,418.25 94,343.25 94,122.25 127.07,89.18 645,89.18 722,166.18 722,191.18 v1(755,224.18)
NetFB3_2: FB3.2 J2.7 | length 1419.8
  TopLayer w14: v1(750,105.18) FB3.2
  BottomLayer w14: J2.7 67,693.86 67,108.18 115,60.18 657,60.18 702,105.18 v1(750,105.18)
NetJ3_1: C59.1 J3.1 L16.1 | length 277.5
  TopLayer w30: C59.1 L16.1 ; 1565,1555 1595,1555 1620,1580 J3.1
NetL3_2: C58.2 D1.A D2.A L3.2 TP3.1 U2.6 U2.7 | length 1700.6
  TopLayer w14: D1.A@1270,430 1345,430 1445,430 1530,345 ; TP3.1 1345,130 1372,130 1447,130 1447,137 1475,165 1475,290 1530,345 ; v1(1847,529.18) 1847,370 L3.2 1742,265 1655,265 1575,345 1530,345 ; U2.6 1903.95,676.23 v1(1917,663.18) ; U2.7 1929.54,675.72 v1(1917,663.18) ; C58.2 2038,647 1933.18,647 v1(1917,663.18)
  BottomLayer w14: v1(1847,529.18) 1847,628.18 1882,663.18 v1(1917,663.18)
NetL4_2: C16.2 C51.2 L4.2 R4.2 | length 297.1
  TopLayer w14: C51.2 R4.2 C16.2 1711.51,504.18 L4.2 ; L4.2@1718.98,504.18 L4.2@1722,504.18
NetL5_2: C9.1 C20.1 L5.2 Q1.C | length 175.6
  TopLayer w14: C9.1 1870.64,587.18 1897.82,560 ; Q1.C 1897.82,560 ; C20.1 1912,574.18 1897.82,560
NetL9_2: L9.2 L12.1 L15.1 | length 110.7
  TopLayer w12: L12.1 L15.1 345.39,912.25 L9.2
NetL10_2: L10.2 Q4.B R24.2 R26.1 | length 221.1
  TopLayer w14: R24.2 L10.2 584.32,655.18 559.32,680.18 Q4.B 582.12,702.18 608.12,728.18 R26.1
NetL11_1: C33.1 C35.2 L11.1 Q5.E | length 188.4
  TopLayer w14: Q5.E 490.32,318.18 C33.1 L11.1 ; L11.1@544.32,256.18 L11.1 ; C35.2 600.32,258.18 L11.1
NetL12_2: C28.2 C45.1 L12.2 | length 159.6
  TopLayer w12: L12.2 C45.1 299.76,1013.25 319.69,1033.18 C28.2
NetL14_2: C43.2 C46.1 L14.2 Q6.E | length 250.4
  TopLayer w14: L14.2 C43.2 1408.87,1309.72 1408.87,1356.72 Q6.E 1346.87,1359.72 1342.87,1363.72 C46.1 L14.2
NetQ5_C: C29.2 C33.2 L8.2 Q5.C | length 334.8
  TopLayer w14: L8.2 387.32,407.18 404.32,390.18 Q5.C 445.32,379.18 446.32,378.18 C33.2 571.32,378.18 584.32,391.18 C29.2
NetQ10_B: Q10.B R48.1 | length 68.3
  TopLayer w12: Q10.B 572.31,970.25 R48.1
NetQ11_B: Q11.B R51.2 | length 486.4
  TopLayer w14: R51.2 1008,1081.18 1026,1063.18 1094,1063.18 1120,1037.18 1120,958.18 1138,940.18 1190,940.18 1218,912.18 1273,912.18 Q11.B
NetR1_2: C12.1 C13.1 R1.2 TP2.1 U2.5 U2.8 | length 655.2
  TopLayer w14: R1.2 C13.1 1629,911.18 C12.1 1642,908.18 1652,898.18 1652,823 TP2.1 1670.18,820 1712,778.18 1864.72,778.18 1878.36,764.54 ; U2.5 1878.36,764.54 ; U2.8 1955.13,765.05 1942,778.18 1892,778.18 1878.36,764.54
NetR8_2: R8.2 U4.1 | length 79.4
  TopLayer w14: U4.1 1064,810.18 1065,811.18 R8.2
NetR9_1: C51.1 R8.1 R9.1 | length 594.1
  TopLayer w14: R8.1 1154,871.18 1172,853.18 1172,789.18 1202,759.18 1364,759.18 1391,732.18 1391,639.18 1367,615.18 1367,569.18 R9.1 C51.1
NetR10_2: R10.2 U3.1 U4.4 | length 240.8
  TopLayer w14: U3.1 869,827.18 909,827.18 R10.2 930,717.18 952,695.18 U4.4
NetR11_1: R11.1 R47.1 | length 222.5
  TopLayer w14: R47.1 887.68,958.5 910.37,935.81 R11.1
NetR11_2: R11.2 U3.3 | length 153.4
  TopLayer w14: U3.3 794,928.24 R11.2
NetR12_1: R10.1 R12.1 U4.3 | length 127.1
  TopLayer w14: R10.1 935,861.18 R12.1 U4.3
NetR15_1: R13.2 R14.2 R15.1 | length 175.6
  TopLayer w14: R14.2 2101.62,425.18 2132.32,425.18 R15.1 R13.2
NetR16_1: C25.1 R16.1 R17.1 R37.1 | length 278.6
  TopLayer w14: R37.1 1180,335 R16.1 1220,295 C25.1@1220,230 ; C25.1 C25.1@1220,230 ; C25.1@1220,225 C25.1@1220,230 ; R17.1 1295,230 C25.1@1220,230
NetR19_2: Q3.C R19.2 R21.1 | length 195.5
  TopLayer w14: R19.2 214.32,601.18 232.32,619.18 Q3.C ; R19.2@215.32,563.18 R21.1
NetR21_2: Q2.B R21.2 | length 54
  TopLayer w14: Q2.B R21.2
NetR22_1: Q3.B R22.1 | length 117.9
  TopLayer w14: Q3.B 385.32,699.18 404.32,680.18 R22.1
NetR23_1: Q2.C R23.1 | length 110.3
  TopLayer w14: Q2.C 326.07,369.18 R23.1
NetR24_1: C30.1 L7.2 L9.1 Q4.C R24.1 | length 377.1
  TopLayer w12: L7.2 396.32,778.18 406.32,788.18 C30.1 L9.1
  TopLayer w14: L7.2 396.32,778.18 466.32,778.18 479.32,765.18 Q4.C@479.32,749.83 ; R24.1 464.32,725.18 Q4.C
NetR27_1: C34.1 Q4.E R27.1 R30.2 | length 205.6
  TopLayer w14: R30.2 568.32,847.18 C34.1 ; Q4.E 569.32,787.18 C34.1 ; R27.1 C34.1
NetR30_1: Q10.C R30.1 | length 95
  TopLayer w12: Q10.C@479.64,995.57 Q10.C ; R30.1 Q10.C@499.32,995.57
NetR31_2: J2.10 R31.2 U5.1 | length 952.5
  TopLayer w12: v1(237.72,1207.76) 240,1205.47 U5.1
  TopLayer w14: R31.2 101.32,391.18 118.32,408.18 J2.10
  BottomLayer w14: J2.10 214.09,540.95 214.09,1184.14 v1(237.72,1207.76)
NetR33_1: C42.1 L13.1 R33.1 | length 60.2
  TopLayer w14: C42.1 1487.87,1620.72 R33.1 R33.1@1487.94,1680.65
NetR35_1: C44.1 Q6.B R35.1 | length 122.6
  TopLayer w14: C44.1 R35.1 1346.87,1403.72 1407.24,1403.72 Q6.B
NetR36_1: R34.2 R35.2 R36.1 | length 110
  TopLayer w14: R34.2 R36.1 R35.2
NetR37_2: R37.2 U8.1 | length 89.5
  TopLayer w14: U8.1 1116,271 R37.2
NetR40_2: C11.1 Q7.B R40.2 | length 132.1
  TopLayer w14: R40.2 C11.1 1007.87,1348.72 Q7.B
NetR42_1: Q8.B R42.1 | length 73.5
  TopLayer w12: Q8.B 948,1263.18 R42.1
NetR43_2: C41.1 R33.2 R43.2 | length 106
  TopLayer w14: R43.2@1388.87,1757.72 1405.87,1740.72 C41.1 R33.2
NetR48_2: J2.1 R48.2 | length 1010.8
  TopLayer w12: J2.1 175,1288.5 175,1142.18 ; 175,1141.25 214,1102.25 353.07,1102.25 375.32,1080 375.32,950 382.68,942.64 437.8,942.64 449.61,930.83 449.61,895.39 469.3,875.71 519.02,875.71 530.89,887.57 530.89,988.48 544.1,1001.69 600.76,1001.69 R48.2
NetR49_1: R49.1 R50.1 U8.3 | length 185.9
  TopLayer w14: R50.1 1014,187.18 U8.3 1041,274 R49.1
NetR53_1: R53.1 U5.3 | length 405.9
  TopLayer w14: v2(291,1207) 291,1152.43 U5.3 ; v2(580,1201) 591,1190 R53.1
  BottomLayer w14: v2(291,1207) 297,1201 v2(580,1201)
NetR55_2: R55.2 U5.6 | length 455.4
  TopLayer w10: U5.6@291.18,1349.1 U5.6 291.18,1278.82 338,1232 582,1232 R55.2
NetU1_4: C1.1 C3.1 L2.1 U1.4 | length 213.8
  TopLayer w14: L2.1 1505,691.18 1505.41,691.59 U1.4 1538.59,691.59 1547,683.18 1560,683.18 C3.1 1565,681.18 1616,732.18 C1.1
NetU2_12: C17.1 U2.12 | length 98.9
  TopLayer w12: U2.12 1980.72,1011.15 2027.76,1058.18 C17.1
NetU2_13: C14.1 U2.13 | length 114.2
  TopLayer w12: U2.13 1955.13,1041.26 C14.1
  TopLayer w14: U2.13 1955.13,1015.05
NetU2_14: U2.14 Y2.4 | length 237.1
  TopLayer w14: U2.14 1929.54,941.29 1955.84,915 2026.31,915 2074.05,962.74 Y2.4
NetU2_16: R2.1 U2.16 Y2.1 | length 559.5
  TopLayer w12: R2.1 v1@2128.82,1058.18
  TopLayer w14: v1(1873.36,934.54) 1878.36,939.54 U2.16 ; v1(2030.14,884.5) Y2.1
  BottomLayer w14: v1(1873.36,934.54) 2001,934.54 ; v1(2030.14,884.5) 2001,913.65 2001,934.54 ; v1(2129,1058) 2023,1058 2001,1036 2001,934.54
NetU2_17: C7.1 U2.17 | length 115.1
  TopLayer w12: U2.17 1852.77,1024.57 1886.39,1058.18 C7.1
  TopLayer w14: C7.1@1911.83,1057.95 C7.1
NetU2_18: U2.18 Y1.4 | length 187.5
  TopLayer w12: Y1.4 1725.68,1079.05 1749.54,1055.19 1800.72,1055.19 1827.18,1028.72 U2.18
NetU2_19: C5.1 U2.19 | length 136.2
  TopLayer w14: C5.1 1791,927.18 1801.59,937.77 U2.19
NetU2_20: U2.20 Y1.1 | length 168.6
  TopLayer w12: U2.20 v1(1776,1030.47) ; Y1.1 1832.21,1098.5 1836.15,1094.56 v1(1836.15,1059.13)
  BottomLayer w12: v1(1776,1030.47) 1807.5,1030.47 v1(1836.15,1059.13)
NetU5_2: J2.9 U5.2 | length 862.8
  TopLayer w12: v1(210.16,1239.25) 245.59,1239.25 265.59,1219.25 U5.2
  BottomLayer w14: J2.9 190.47,617.33 190.47,1219.57 v1(210.16,1239.25)
NetU6_3: C28.1 U6.3 | length 162.7
  TopLayer w12: C28.1 430.01,1056.87 483.65,1056.87 501,1074.22 U6.3
NetU6_5: U5.5 U6.5 | length 393.7
  TopLayer w14: U5.5@316.77,1349.1 U5.5 316.77,1282.25 348.02,1251 526.18,1251 551,1275.82 U6.5
NetU6_7: C37.2 U6.7 | length 111.8
  TopLayer w14: U6.7 451,1392.36 478.25,1419.61 478.25,1443.25 C37.2
NetU7_1: C39.1 U7.1 | length 74.8
  TopLayer w14: C39.1@1648.05,1183.5 1648.05,1184 1648.05,1209.37 1658,1219.32 U7.1
NetU7_3: C60.1 U7.3 | length 79.7
  TopLayer w14: U7.3 1583,1207 C60.1
NetU7_4: Q8.C R41.1 U7.4 | length 885
  TopLayer w12: Q8.C 876,1307.18 878,1309.18 878,1378.18 ; R41.1 878,1410.18 878,1378.18 ; v1(909,1378.18) 878,1378.18
  TopLayer w14: U7.4 v1(1583,1401.18)
  BottomLayer w12: v1(909,1378.18) 1149,1378.18 1172,1401.18 v1(1583,1401.18)
NetU7_6: R42.2 U7.6 U9.3 | length 937.6
  TopLayer w12: R42.2 979,1169.18 1041,1169.18 1055,1155.18 1055,1132.18 1067.18,1120 U9.3 1177.82,1120 1195,1137.18 1195,1251.18 1217,1273.18 v1(1489,1273.18) ; v1(1563,1302.18) 1580,1302.18
  TopLayer w14: 1580,1302.18 1592.18,1302.18 1605,1315 1648,1315 1658,1325 U7.6
  BottomLayer w12: v1(1489,1273.18) 1534,1273.18 v1(1563,1302.18)
NetU9_2: Q7.C R39.1 R51.1 U9.2 | length 475.6
  TopLayer w14: R51.1 1037,1198.18 1080,1241.18 ; U9.2 1147.41,1145.59 1158,1156.18 1158,1206.18 1123,1241.18 1080,1241.18 ; R39.1 1111.87,1354.72 1092.87,1335.72 Q7.C 1080.46,1305.72 1080,1306.18 1080,1305.72 1080,1241.18
NetU9_6: C48.1 Q11.E R38.1 U9.6 U9.7 | length 521.4
  TopLayer w12: C48.1 1232,1031.18 1249,1048.18
  TopLayer w14: U9.6@1301.85,1120 U9.6 U9.6@1262.18,1120 ; Q11.E 1276,1021.18 1249,1048.18 1240,1057.18 1240,1097.82 U9.6@1262.18,1120 ; R38.1 1318,1235.18 1318,1212.18 1349,1181.18 1349,1158.18 1336.41,1145.59 U9.7 1261.41,1145.59 1249,1133.18 U9.6@1262.18,1120
NetY4_2: C32.1 Y4.2 | length 96
  TopLayer w14: Y4.2 379.07,217.25 C32.1
NetY5_2: C38.1 D3.A R46.2 Y5.2 | length 197.4
  TopLayer w14: R46.2 C38.1 ; Y5.2 1439.98,972.2 C38.1 ; D3.A C38.1
RSSI: FB3.1 R50.2 U8.4 | length 206.7
  TopLayer w14: FB3.1 907,105.18 935,77.18 R50.2 1031,77.18 U8.4
pads on no net: R52.3 U2.3 U9.5 Y1.3 Y2.3

## Polygon pours and split planes (outlines as drawn)
GND_SIGNAL on TopLayer "TopLayer-GND_SIGNAL" (solid, remove dead copper, pour order 1000): 1688.36,889.54 1793.36,889.54 1808.36,904.54 1968.36,904.54 2003.36,869.54 2003.36,829.54 2068.36,764.54 2068.36,699.54 2028.36,699.54 2028.36,759.54 2013.36,774.54 1973.36,774.54 1948.36,799.54 1718.36,799.54 1688.36,829.54
GND_SIGNAL on TopLayer "BottomLayer-GND_SIGNAL" (solid, remove dead copper, pour order 1002): -41.68,1910 2328.32,1910 2328.32,-60 -41.68,-60
GND_SIGNAL on BottomLayer "BottomLayer-GND_SIGNAL" (solid, remove dead copper, pour order 1002): -69,1958.18 2481,1958.18 2481,-291.82 -69,-291.82

## Keep-outs
KeepOutLayer:
  lines w20: -49.68,-60 -49.68,1910 2320.32,1910 2320.32,-60 -49.68,-60

## Other copper
TopLayer:
  pour cut-out: 200.32,1424 600.32,1424 600.32,1060 200.32,1060
  pour cut-out: 628.32,415 583.32,415 583.32,276 628.32,276 628.32,172 581.32,172 581.32,146 176.32,146 176.32,318 116.32,318 116.32,652 296.32,652 296.32,728 628.32,728
  pour cut-out: 1190.32,1712 1498.32,1712 1498.32,1399 1190.32,1399
  pour cut-out: 1702.32,1427 1702.32,1253 1897.32,1253 1897.32,1062 1645.32,1062 1645.32,1254 1521.32,1254 1521.32,1427
  pour cut-out: 1668.32,573 1668.32,933 1528.32,933 1528.32,573
  pour cut-out: 2207.03,812 2036.32,812 2036.32,1021 2207.03,1021
  pour cut-out: 2241.32,607 2241.32,163 2173.32,163 2173.32,-10 1891.32,-10 1891.32,607
  text "ActivewaveInc.com" at 1557,1759 h50
  text "TRX-101" at 2133,1719 h50 r270
  text "REV.17" at 2054,1710 h50 r270
  text "ACTIVE" at 1775,1348 h40
  text "WAVE" at 1778,1276 h50
  text ".Layer_Name" at 125,-375 h100
BottomLayer:
  text "TRX-101" at 1031,1729.18 h50
  text "REV 16" at 987,1658.18 h50
  text ".Layer_Name" at 1000,-375 h100
MultiLayer:
  lines w10: -49.68,-60 2270.32,-60 2320.32,-60 2320.32,1910 2270.32,1910 -49.68,1910 -49.68,-60

## Silkscreen, mask and mechanical layers (free items; w line width, h text height)
TopOverlay:
  lines w10: 1296.87,1728.72 1397.87,1728.72 1397.87,1650.72 ; 1416.87,1788.72 1416.87,1770.72 1427.87,1770.72 ; 1444.01,938.18 1444.01,950 ; 1444.01,995 1444.01,1002.18 ; 1522,995 1522,1001.18 ; 1526,915 1526,950 ; 1561.01,938.18 1561.01,950 ; 1561.01,995 1561.01,1002.18 ; 1673,42.18 1673,120.54 ; 1779.36,142.18 1873,142.18 ; 1870,142.18 1870,171.54 ; 1871.32,-7.82 1871.32,42.18 ; 1871.32,231.54 1871.32,312.18
  text ".Layer_Name" at 150,-375 h100
TopPaste:
  lines w8: -19.68,-60 -49.68,-60 ; -49.68,-60 -49.68,-22 -49.68,-60
  text ".Layer_Name" at 150,-375 h100
BottomPaste:
  text ".Layer_Name" at 1030,-375 h100
TopSolder:
  text ".Layer_Name" at 150,-375 h100
BottomSolder:
  text ".Layer_Name" at 1080,-375 h100
Assembly:
  lines w10: 1364.98,1225.71 1484.62,1225.71
  text ".Layer_Name" at 164,-375 h106.67
Outline:
  circle w10: c2098.32,1304.18 r65.01
  lines w10: -49.68,-60 -49.68,1910 2320.32,1910 2320.32,-60 -49.68,-60
Title:
  lines w10: -998.22,-1676.89 -998.22,-576.89 cw(c-898.22,-576.89) -898.22,-476.89 3301.78,-476.89 cw(c3301.78,-576.89) 3401.78,-576.89 3401.78,-1676.89 cw(c3301.78,-1676.89) 3301.78,-1776.89 -898.22,-1776.89 ; -998.22,-1675.89 ccw(c-897.22,-1675.89) -898.98,-1776.88 ; -899.09,-1726.89 cw(c-898.22,-1676.89) -948.22,-1676.89 -948.22,-1576.89 cw(c-898.22,-1576.89) -898.22,-1526.89 776.78,-1526.89 cw(c776.78,-1576.89) 826.78,-1576.89 826.78,-1676.89 ; -899.09,-1476.89 cw(c-898.22,-1426.89) -948.22,-1426.89 -948.22,-1201.89 cw(c-898.22,-1201.89) -898.22,-1151.89 -148.22,-1151.89 ; -898.22,-1726.89 776.78,-1726.89 ; -898.22,-1476.89 -148.22,-1476.89 ; -148.93,-1151.92 cw(c-147.22,-1200.89) -98.22,-1200.89 ; -148.22,-1101.89 -898.22,-1101.89 cw(c-898.22,-1051.89) -948.22,-1051.89 -948.22,-826.89 cw(c-898.22,-826.89) -898.22,-776.89 -148.22,-776.89 ; -147.22,-1476.89 ccw(c-147.22,-1427.89) -98.22,-1427.89 ; -147.22,-776.89 cw(c-147.22,-825.89) -98.22,-825.89 ; -146.22,-1101.89 ccw(c-146.22,-1053.89) -98.22,-1053.89 ; -98.22,-1426.89 -98.22,-1201.89 ; -98.22,-1051.89 -98.22,-826.89 ; -48.22,-1427.89 ccw(c0.78,-1427.89) 0.78,-1476.89 ; -48.22,-1426.89 -48.22,-1301.89 cw(c1.78,-1301.89) 1.78,-1251.89 1601.78,-1251.89 ; -48.22,-1152.89 ccw(c0.78,-1152.89) 0.78,-1201.89 ; -48.22,-1151.89 -48.22,-826.89 cw(c1.78,-826.89) 1.78,-776.89 2051.78,-776.89 cw(c2051.78,-826.89) 2101.78,-826.89 2101.78,-1151.89 ; 1.78,-1476.89 1601.78,-1476.89 ; 1.78,-1201.89 2051.78,-1201.89 ; 777.94,-1726.9 ccw(c778.78,-1678.89) 826.76,-1677.22 ; 925.91,-1726.89 cw(c926.78,-1676.89) 876.78,-1676.89 876.78,-1576.89 cw(c926.78,-1576.89) 926.78,-1526.89 2601.78,-1526.89 cw(c2601.78,-1576.89) 2651.78,-1576.89 2651.78,-1676.89 ; 926.78,-1726.89 2601.78,-1726.89 ; 1602.78,-1476.89 ccw(c1602.78,-1427.89) 1651.77,-1427.04 ; 1602.78,-1251.89 cw(c1602.78,-1300.89) 1651.78,-1300.89 ; 1651.78,-1426.89 1651.78,-1301.89 ; 1701.78,-1426.89 1701.78,-1301.89 ; 1701.78,-1425.89 ccw(c1752.78,-1425.89) 1751.89,-1476.89 ; 1701.84,-1302.41 cw(c1749.78,-1299.89) 1749.78,-1251.89 ; 1751.78,-1476.89 2051.78,-1476.89 ccw(c2051.78,-1426.89) 2101.78,-1426.89 2101.78,-1301.89 ; 1751.78,-1251.89 2051.78,-1251.89 ; 2052.65,-1201.9 ccw(c2051.78,-1151.89) 2101.79,-1151.89 ; 2052.78,-1251.89 cw(c2052.78,-1300.89) 2101.78,-1300.89 ; 2151.78,-1427.89 ccw(c2200.78,-1427.89) 2201.63,-1476.89 ; 2151.78,-1426.89 2151.78,-1301.89 cw(c2201.78,-1301.89) 2201.78,-1251.89 3301.78,-1251.89 ; 2201.78,-1476.89 3301.78,-1476.89 ccw(c3301.78,-1426.89) 3351.78,-1426.89 3351.78,-1300.89 ccw(c3302.78,-1300.89) 3302.78,-1251.89 ; 2602.94,-1726.9 ccw(c2603.78,-1678.89) 2651.76,-1677.22 ; 2701.78,-1677.89 ccw(c2750.78,-1677.89) 2751.63,-1726.89 ; 2701.78,-1676.89 2701.78,-1576.89 cw(c2751.78,-1576.89) 2751.78,-1526.89 3301.78,-1526.89 ; 2751.78,-1726.89 3301.78,-1726.89 ccw(c3301.78,-1676.89) 3351.78,-1676.89 3351.78,-1576.89 ; 3301.07,-526.92 cw(c3302.78,-575.89) 3351.78,-575.89 ; 3301.78,-1526.88 cw(c3301.78,-1576.89) 3351.78,-1576.02 ; 3301.78,-526.89 2201.78,-526.89 ccw(c2201.78,-576.89) 2151.78,-576.89 2151.78,-1151.89 ccw(c2201.78,-1151.89) 2201.78,-1201.89 3301.78,-1201.89 ccw(c3301.78,-1151.89) 3351.78,-1151.89 3351.78,-576.89 ; -948.22,-676.89 ccw(c-898.22,-676.89) -898.22,-726.89 2051.78,-726.89 ccw(c2051.78,-676.89) 2101.78,-676.89 2101.78,-576.89 ccw(c2051.78,-576.89) 2051.78,-526.89 -898.22,-526.89 ccw(c-898.22,-576.89) -948.22,-576.89 -948.22,-676.89
  text "Active Wave" at 131.78,-671.89 h96
  text "Active Wave" at 2242.86,-687.72 h100
  text "902 Clint Moore Rd." at 2192.86,-792.72 h64
  text "TITLE:" at -10.72,-864.39 h53.33
  text "ENGINEER:" at -898.22,-876.89 h53.33
  text "Suite 118" at 2487.86,-897.72 h64
  text "TRX-101" at 764,-970 h96
  text "Boca Raton FL." at 2352.86,-992.72 h64
  text "PHONE:" at -898.22,-1064.39 h53.33
  text "561-999-9422" at 2407.86,-1112.72 h64
  text "TRANSCEIVER" at 648,-1146 h80
  text "Drawn by:" at -898.22,-1256.89 h53.33
  text "J.N" at -515.26,-1257.95 h53.33
  text "PART NO.:" at 1.78,-1339.39 h53.33
  text "REV:" at 1739.28,-1339.39 h53.33
  text "DATE:" at 2201.78,-1339.39 h53.33
  text "02/10/2009" at 2616.55,-1392.35 h53.33
  text "17" at 1914.28,-1414.39 h53.33
  text "PHONE:" at -898.22,-1439.39 h53.33
  text "FILE NAME:" at -898.22,-1616.89 h53.33
  text "LAYER:" at 941.78,-1616.89 h53.33
  text "GERBER:" at 2761.78,-1616.89 h53.33
Shield Layer Left:
  drawing of 201 lines, arcs and shapes, not listed
  text "0.000" at -239,2545 h60 r270
  text "0.100" at -134,2545 h60 r270
  text "0.210" at -24.68,2545 h60 r270
  text "0.560" at 320.32,2545 h60 r270
  text "0.910" at 670.32,2545 h60 r270
  text "1.020" at 780.32,2535 h60 r270
  text "1.120" at 880.32,2535 h60 r270
  text "0.000" at -739.68,2045 h60
  text "0.100" at -739.68,1940 h60
  text "0.220" at -745,1825 h60
  text "280" at 458.32,1740.18 h60
  text "0.610" at -744.68,1435 h60
  text "20 MIL WIDE (x 14)" at 1001,1434.18 h60
  text "1.010" at -744.68,1035 h60
  text "1.410" at -744.68,635 h60
  text "1.810" at -744.68,235 h60
  text "2.070" at -744.68,-30 h60
  text "2.190" at -739.68,-145 h60
  text "2.290" at -739.68,-250 h60
Shield Layer Right:
  drawing of 274 lines, arcs and shapes, not listed
  text "0.000" at 460.32,2500 h60 r270
  text "0.100" at 565.32,2500 h60 r270
  text "0.210" at 675.32,2500.18 h60 r270
  text "0.560" at 1020.32,2500.18 h60 r270
  text "0.910" at 1370.32,2500.18 h60 r270
  text "1.260" at 1720.32,2500.18 h60 r270
  text "1.780" at 2240.32,2500.18 h60 r270
  text "1.890" at 2350.32,2500.54 h60 r270
  text "1.990" at 2450.32,2500.54 h60 r270
  text "0.000" at 10.32,2045.18 h60
  text "0.100" at 10.32,1945.18 h60
  text "0.220" at 11,1826 h60
  text "280" at 1972.16,1745.02 h60
  text "0.610" at 10.32,1435 h60
  text "20 MIL WIDE (x18)" at 2527,1432.54 h60
  text "280" at 1773.32,1184.18 h60
  text "130" at 1047.58,1087.76 h60
  text "1.010" at 10.32,1035 h60
  text "130" at 1847.2,665.76 h60
  text "1.410" at 10.32,635 h60
  text "1.810" at 10.32,235 h60
  text "2.070" at 10.32,-26 h60
  text "2.190" at 10.32,-144.82 h60
  text "2.290" at 10.32,-244.82 h60
DrillDrawing:
  lines w10: -425.68,60 -385.68,-60 ; -425.68,1790 -385.68,1910 ; -395.68,-60 -375.68,-60 ; -395.68,1910 -375.68,1910 ; -385.68,475.95 -385.68,-60 ; -385.68,1374.05 -385.68,1910 ; -345.68,60 -385.68,-60 ; -345.68,1790 -385.68,1910 ; -49.68,-60 -385.68,-60 ; -49.68,2160 -49.68,2180 ; 70.32,2130 -49.68,2170 ; 70.32,2210 -49.68,2170 ; 676.84,2170 -49.68,2170 ; 1593.8,2170 2320.32,2170 ; 2200.32,2130 2320.32,2170 ; 2200.32,2210 2320.32,2170 ; 2320.32,1910 2320.32,2170 ; 2320.32,2160 2320.32,2180 ; -385.68,1910 -49.68,1910 -49.68,2170
  lines w25: -686.14,4778.28 -176.14,4778.28
  text "NOTES" at -666.14,4823.28 h100
  text "1) BOARD MEASURES 2.370 X  1.970 IN" at -666.14,4623.28 h100
  text "2) MATERIAL IS FR4" at -666.14,4423.28 h100
  text "3) BOARD IS 2 LAYER WITH THICKNESS OF .031 IN" at -666.14,4223.28 h100
  text "4) COPPER WEIGHT IS 1 OUNCE" at -666.14,4023.28 h100
  text "5) FINISH IS SMOBC" at -666.14,3823.28 h100
  text "6) NO CUTOUTS" at -666.14,3623.28 h100
  text "7) ROUTE TO BOARD OUTLINE" at -666.14,3423.28 h100
  text "8) ADD SILKSCREEN" at -666.14,3223.28 h100
  text "9) NO SILKSCREEN ON PADS" at -666.14,3023.28 h100
  text "10) GREEN SOLDER MASK BOTH SIDES" at -666.14,2823.28 h100
  text "11) HASL ON ALL PADS AND VIAS" at -666.14,2623.28 h100
  text "2370 (mil)" at 686.84,2058.59 h120
  text "1970 (mil)" at -274.27,485.95 h120 r90
  text ".Legend" at 2794,-42 h50